# Altium PCB EMBV3.PcbDoc
Units mm, origin at the board's own origin, x right, y up, seen from the top; angles counter-clockwise.
Board outline 31 x 65 mm, 2 copper layers (Top Layer, Bottom Layer); 66 components, 50 nets, 186 pads, 87 vias.
Unrouted connection lines stored in the file: 8.
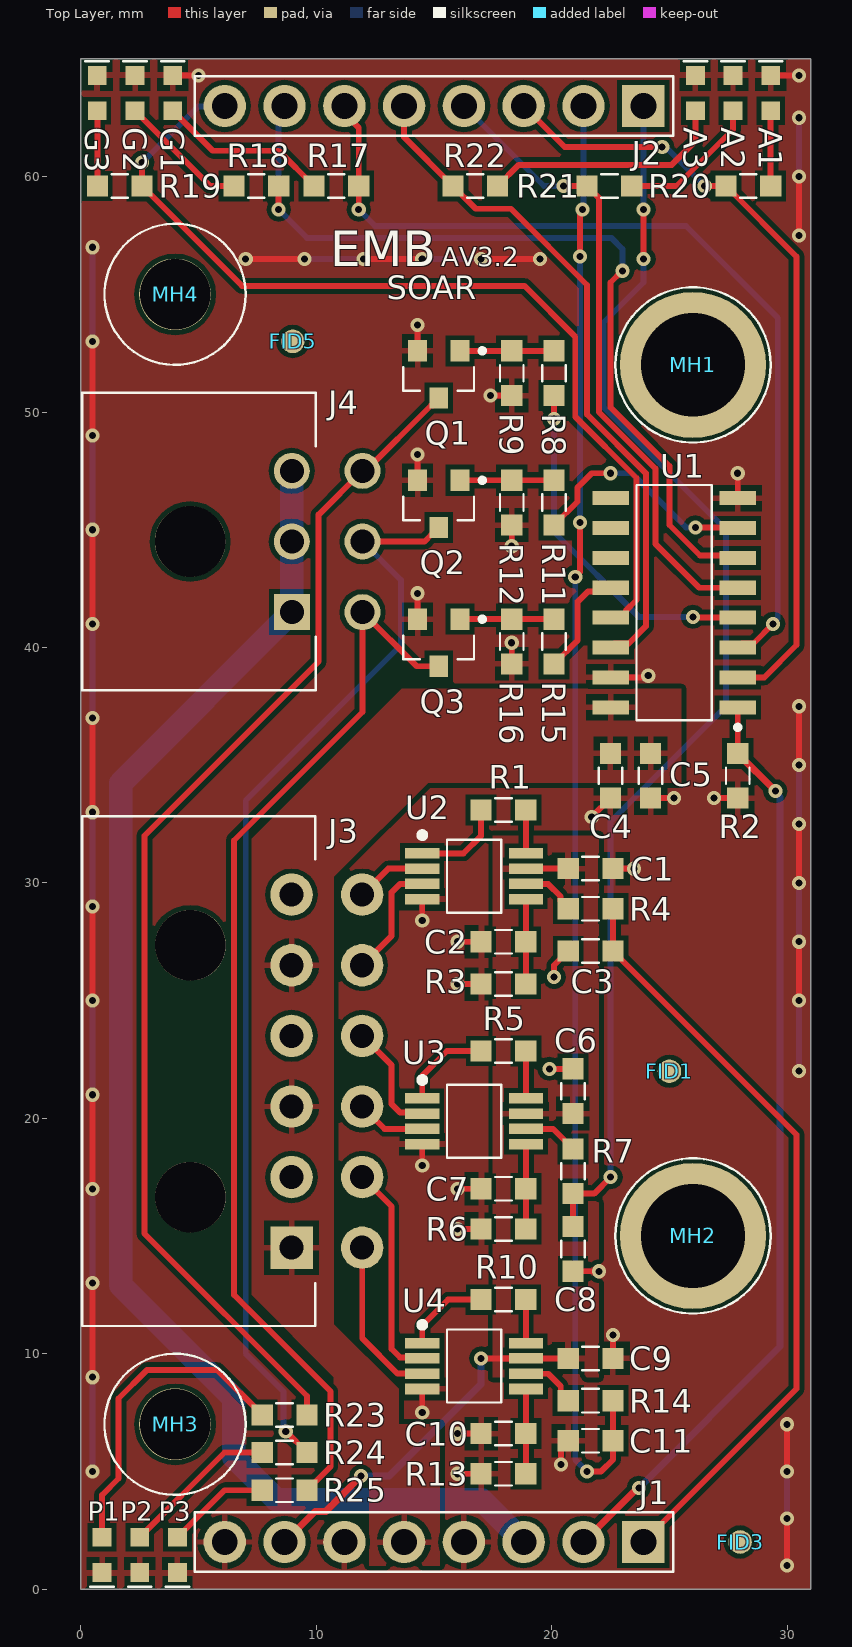
[diagram p0: Top Layer view]
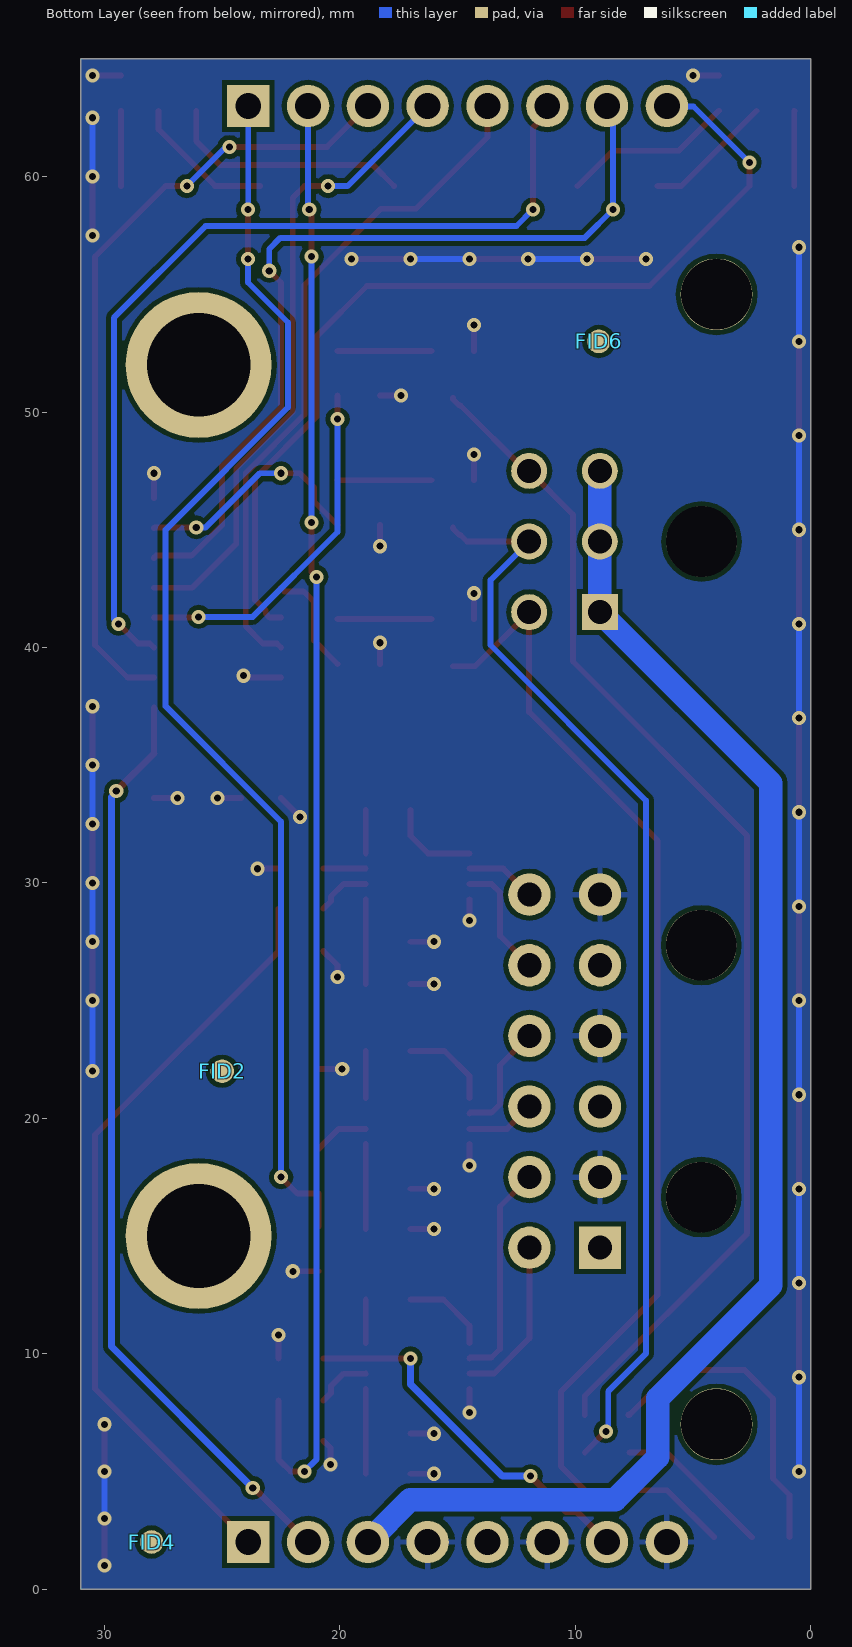
[diagram p1: Bottom Layer view, seen from below]
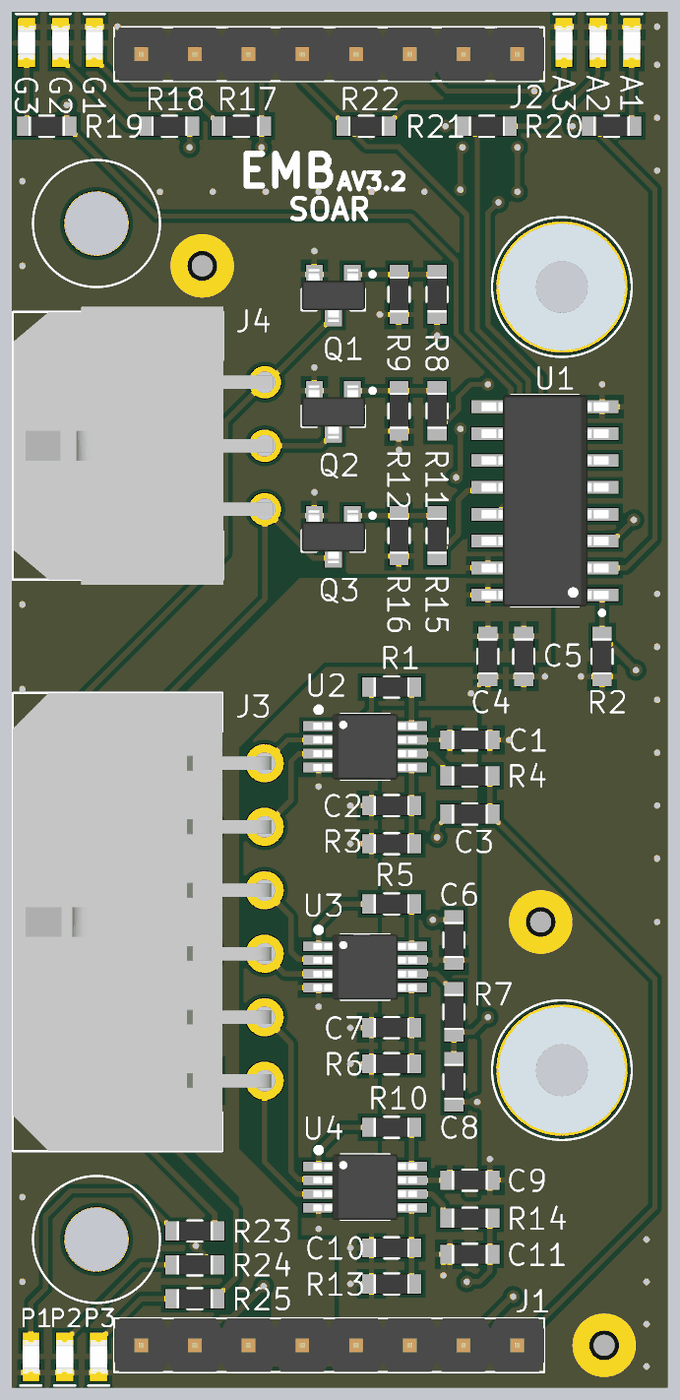
[diagram p2: 3D render of the assembled board from above, using the file's embedded part models]

## Layer stack, top to bottom
Top Solder: solder mask 0.0102, Solder Resist, Dk 3.5
Top Layer: signal copper 0.0711
Dielectric 1: dielectric 0.32, FR-4, Dk 4.8
Bottom Layer: signal copper 0.0711
Bottom Solder: solder mask 0.0102, Solder Resist, Dk 3.5

## Board outline
0,0 31,0 31,65 0,65

## Design rules (kind name [scope] priority, off if disabled: settings)
Clearance [All] p1: gap=0.2 ignorepadtopadclearanceinfootprint=FALSE except(0: Arc-Hole Track-Hole SMDPad-Hole THPad-Hole Via-Hole Fill-Hole Poly-Hole Region-Hole Text-Hole; 0.15: Arc-Arc Arc-Track Track-Track)
DiffPairsRouting [All] p1: maxlimit=0.25 minlimit=0.15 mostfreqgap=0.15 toplayer_minwidth=0.15 toplayer_maxwidth=0.25 toplayer_prefwidth=0.25 bottomlayer_minwidth=0.15 bottomlayer_maxwidth=0.25 bottomlayer_prefwidth=0.25 maxuncoupledlength=12.7
Height [All] p1: minheight=0 maxheight=30 prefheight=12.7
HoleSize [All] p1: absolutevalues=TRUE maxlimit=5 minlimit=0.3 maxpercent=80.000 minpercent=20.000
MinimumSolderMaskSliver [All] p1: minsoldermaskwidth=0.076
PolygonConnect [All] p1: thpad.connectstyle=Relief thpad.reliefconductorwidth=0.254 thpad.reliefentries=4 thpad.polygonreliefangle="90 Angle" thpad.airgapwidth=0.254 smdpad.connectstyle=Relief smdpad.reliefconductorwidth=0.254 smdpad.reliefentries=4 smdpad.polygonreliefangle="90 Angle" smdpad.airgapwidth=0.254 via.connectstyle=Direct via.reliefconductorwidth=0.254 via.reliefentries=4 via.polygonreliefangle="90 Angle" via.airgapwidth=0.254
RoutingVias [All] p1: holewidth=0.35 width=0.7 viastyle="Through Hole" minholewidth=0.25 minwidth=0.5 maxholewidth=0.711 maxwidth=1.27
SilkToSilkClearance [All] p1: silktosilkclearance=0.1
SilkToSolderMaskClearance [IsPad] p1: minsilkscreentomaskgap=0.09 clearancetoexposedcopper=TRUE
SolderMaskExpansion SolderMaskExpansion_Vias [IsVia] p1: expansion=0 istentingtop=TRUE
SolderMaskExpansion [All] p2: expansion=0.05 istentingtop=FALSE
Width [All] p1: maxlimit=2 minlimit=0.2 preferedwidth=0.25 minimp=50.000000 maximp=50.000000 favimp=50.000000
24 further rules are at their usual default settings.

## Components (designator, comment, footprint, x,y, rotation, side; value= is the part's Value field where it differs from the comment)
A1 "LTST-C191KGKT" LTST-C191KGKT 29.304,63.55 r270 top
A2 "LTST-C191KGKT" LTST-C191KGKT 27.7,63.55 r270 top
A3 "LTST-C191KGKT" LTST-C191KGKT 26.1,63.55 r270 top
C1 "CGA3E2X7R1E104K080AA" 0603[1608] 21.65,30.604 r180 top
C2 "CC0603JRNPO9BN511" 0603[1608] 17.95,27.5 r0 top
C3 "CL10A105KP8NNNC" 0603[1608] 21.65,27.1 r0 top
C4 "CL10A106MP8NNNC" 0603[1608] 22.496,34.55 r90 top
C5 "CGA3E2X7R1E104K080AA" 0603[1608] 24.2,34.55 r90 top
C6 "CGA3E2X7R1E104K080AA" 0603[1608] 20.9,21.15 r270 top
C7 "CC0603JRNPO9BN511" 0603[1608] 17.95,17.004 r0 top
C8 "CL10A105KP8NNNC" 0603[1608] 20.9,14.45 r90 top
C9 "CGA3E2X7R1E104K080AA" 0603[1608] 21.65,9.8 r180 top
C10 "CC0603JRNPO9BN511" 0603[1608] 17.95,6.604 r0 top
C11 "CL10A105KP8NNNC" 0603[1608] 21.65,6.3 r0 top
FID1 "FID_1MM_ROUND_SL" FID_1MM_ROUND_SL 25,22 r0 top
FID2 "FID_1MM_ROUND_SL" FID_1MM_ROUND_SL 25,22 r90 bottom
FID3 "FID_1MM_ROUND_SL" FID_1MM_ROUND_SL 28,2 r90 top
FID4 "FID_1MM_ROUND_SL" FID_1MM_ROUND_SL 28,2 r90 bottom
FID5 "FID_1MM_ROUND_SL" FID_1MM_ROUND_SL 9,53 r90 top
FID6 "FID_1MM_ROUND_SL" FID_1MM_ROUND_SL 9,53 r90 bottom
G1 "LTST-C191KGKT" LTST-C191KGKT 3.9,63.55 r270 top
G2 "LTST-C191KGKT" LTST-C191KGKT 2.3,63.55 r270 top
G3 "LTST-C191KGKT" LTST-C191KGKT 0.692,63.55 r270 top
J1 "61300811121" 61300811121 15,2 r180 top locked
J2 "61300811121" 61300811121 15,63 r180 top locked
J3 "10132449-1221GLF" 10132449-1221GLF 8.3,22 r270 top
J4 "0430450600" 0430450600 6.8,44.5 r270 top
MH1 "9774110360R" Standoff 26,52 r0 top locked
MH2 "9774110360R" Standoff 26,15 r0 top locked
MH3 "Mounting Hole" MOUNT-HOLE 4,7 r0 top locked
MH4 "Mounting Hole" MOUNT-HOLE 4,55 r0 top locked
P1 "LTST-C191KGKT" LTST-C191KGKT 0.9,1.45 r90 top
P2 "LTST-C191KGKT" LTST-C191KGKT 2.5,1.45 r90 top
P3 "LTST-C191KGKT" LTST-C191KGKT 4.1,1.45 r90 top
Q1 "DMN3023L-7" DMN3023L-7 15.2,51.6 r270 top
Q2 "DMN3023L-7" DMN3023L-7 15.2,46.1 r270 top
Q3 "DMN3023L-7" DMN3023L-7 15.2,40.2 r270 top
R1 "MCT06030C1302FP500" 0603[1608] 17.95,33.1 r180 top
R2 "ERJ-3GEYJ103V" 0603[1608] 27.9,34.55 r90 top
R3 "ERJ-3EKF2003V" 0603[1608] 17.95,25.7 r0 top
R4 "ESR03EZPJ101" 0603[1608] 21.65,28.9 r0 top
R5 "MCT06030C1302FP500" 0603[1608] 17.95,22.854 r180 top
R6 "ERJ-3EKF2003V" 0603[1608] 17.95,15.3 r0 top
R7 "ESR03EZPJ101" 0603[1608] 20.9,17.75 r270 top
R8 "RC1608F331CS" 0603[1608] 20.1,51.65 r90 top
R9 "ERJ-3GEYJ103V" 0603[1608] 18.3,51.65 r90 top
R10 "MCT06030C1302FP500" 0603[1608] 17.95,12.3 r180 top
R11 "RC1608F331CS" 0603[1608] 20.1,46.15 r90 top
R12 "ERJ-3GEYJ103V" 0603[1608] 18.3,46.15 r90 top
R13 "ERJ-3EKF2003V" 0603[1608] 17.95,4.9 r0 top
R14 "ESR03EZPJ101" 0603[1608] 21.65,8.004 r0 top
R15 "RC1608F331CS" 0603[1608] 20.1,40.25 r90 top
R16 "ERJ-3GEYJ103V" 0603[1608] 18.3,40.25 r90 top
R17 "RC1608F331CS" 0603[1608] 10.85,59.6 r0 top
R18 "RC1608F331CS" 0603[1608] 7.45,59.6 r0 top
R19 "RC1608F331CS" 0603[1608] 1.65,59.6 r0 top
R20 "RC1608F331CS" 0603[1608] 28.35,59.6 r180 top
R21 "RC1608F331CS" 0603[1608] 22.45,59.6 r180 top
R22 "RC1608F331CS" 0603[1608] 16.75,59.6 r180 top
R23 "ERA-3AEB2491V" 0603[1608] 8.65,7.4 r0 top
R24 "ERA-3AEB2491V" 0603[1608] 8.65,5.8 r0 top
R25 "ERA-3AEB2491V" 0603[1608] 8.65,4.2 r0 top
U1 "SN74HC157DR" SOIC127P600X175-16N 25.2,41.9 r180 top
U2 "INA326EA/2K5" TSOP65P490X110-8N 16.7,30.279 r0 top
U3 "INA326EA/2K5" TSOP65P490X110-8N 16.7,19.875 r0 top
U4 "INA326EA/2K5" TSOP65P490X110-8N 16.7,9.475 r0 top

## Footprints (in the part's own frame and the unit in brackets; to place one, negate y for a bottom-side part, rotate by r counter-clockwise, add the part's x,y. Pads: shape width x height; smd on the part's side, far side on the other; paste and mask are expansions set on the pad)
0603[1608] [mm]
  rect 0.9x0.9 smd mask+0.05: 1(-0.95,0) 2(0.95,0)
  silkscreen extent -0.35,-0.5 0.35,0.5, body extent -0.85,-0.45 0.85,0.45, height 0.55
10132449-1221GLF [mm] "CONN HEADER R/A 12POS 3MM"
  rect 1.8x1.8 hole 1.02 mask+0.05: 1(7.5,0.65)
  round 1.8 hole 1.02 mask+0.05: 2(7.5,3.65) 3(4.5,0.65) 4(4.5,3.65) 5(1.5,0.65) 6(1.5,3.65) 7(-1.5,0.65) 8(-1.5,3.65) 9(-4.5,0.65) 10(-4.5,3.65) 11(-7.5,0.65) 12(-7.5,3.65)
  round 3 hole 3 mask+0.05: ""(-5.35,-3.65) ""(5.35,-3.65)
  silkscreen extent -10.82,-8.25 10.82,1.65, body extent -10.82,-8.25 10.83,3.97, height 8.78
0430450600 [mm] "6-Pin Molex 3.00mm Pitch"
  round 3 hole 3 unplated mask+0.05: 0(0,-2.16)
  rect 1.53x1.53 hole 1.02 mask+0.05: 1(3,2.16)
  round 1.53 hole 1.02 mask+0.05: 2(0,2.16) 3(-3,2.16) 4(3,5.16) 5(0,5.16) 6(-3,5.16)
  silkscreen extent -6.32,-6.75 6.33,3.18, body extent -6.57,-6.7 6.58,5.54, height 8.28
61300811121 [mm] "CONN HEADER VERT 8POS 2.54MM"
  rect 1.8x1.8 hole 1.1 mask+0.05: 1(-8.89,0)
  round 1.8 hole 1.1 mask+0.05: 2(-6.35,0) 3(-3.81,0) 4(-1.27,0) 5(1.27,0) 6(3.81,0) 7(6.35,0) 8(8.89,0)
  silkscreen extent -10.16,-1.27 10.16,1.27, body extent -10.16,-1.27 10.16,1.27, height 8.57
DMN3023L-7 [mm] "MOSFET N-CH 30V 6.2A SOT23"
  rect 0.9x0.8 smd: 1(-1,0.9) 2(-1,-0.9) 3(1,0)
  silkscreen extent -1.1,-1.5 0.7,1.95, body extent -1.25,-1.5 1.25,1.5, height 1.1
FID_1MM_ROUND_SL [mm] "Fiducial 1MM Round Single Layer"
  round 1 smd mask+1: 0(0,0)
LTST-C191KGKT [mm] "Green 571nm LED Indication - Discrete 2V 0603"
  rect 0.8x0.8 smd paste-3 mask+0.05: 1(-0.75,0) 2(0.75,0)
  silkscreen extent -1.35,-0.5 -1.35,0.5, body extent -0.8,-0.4 0.8,0.4, height 0.8
MOUNT-HOLE [mil] "#4, 0.116in"
  round 120 hole 118 unplated mask+1.97: 0(0,0)
  silkscreen extent -118,-118 118,118, body extent 0,128 0,128, height 10
SOIC127P600X175-16N [mm] "SOIC, 16-Leads, Body 9.90x3.90mm, Pitch 1.27mm, IPC Medium Density"
  rect 1.55x0.6 smd: 1(-2.7,4.445) 2(-2.7,3.175) 3(-2.7,1.905) 4(-2.7,0.635) 5(-2.7,-0.635) 6(-2.7,-1.905) 7(-2.7,-3.175) 8(-2.7,-4.445) 9(2.7,-4.445) 10(2.7,-3.175) 11(2.7,-1.905) 12(2.7,-0.635) 13(2.7,0.635) 14(2.7,1.905) 15(2.7,3.175) 16(2.7,4.445)
  silkscreen extent -2.8,-5 1.6,5.39, body extent -3,-5 3,5, height 1.75
Standoff [mm] "#4, 0.116in"
  round 6.2 hole 4.4 unplated mask+0.05: 0(0,0)
  silkscreen extent -3.3,-3.3 3.3,3.3, body extent -3,-3 3,3, height 11
TSOP65P490X110-8N [mm] "TSOP, 8-Leads, Body 3.00x3.00mm, Pitch 0.65mm, IPC Medium Density"
  rect 1.45x0.45 smd mask+0.05: 1(-2.2,0.975) 2(-2.2,0.325) 3(-2.2,-0.325) 4(-2.2,-0.975) 5(2.2,-0.975) 6(2.2,-0.325) 7(2.2,0.325) 8(2.2,0.975)
  silkscreen extent -2.32,-1.55 1.15,1.87, body extent -2.45,-1.55 2.45,1.55, height 1.1

## Part data
A1 A2 A3 G1 G2 G3 P1 P2 P3: "LED GREEN CLEAR SMD 0603", Colour=Green, Current - Test=20mA, Lens Color=Colourless, Manufacturer="Lite-On Inc.", Millicandela Rating=35mcd, Package / Case="0603 (1608 Metric)", Supplier Part Number 1=160-1446-1-ND, Voltage - Forward (Vf) (Typ)=2V, ComponentLink1Description=Datasheet, ComponentLink1URL=http://optoelectronics.liteon.com/upload/download/DS22-2000-228/LTST-C191KGKT.PDF, Height (Max)=0.65mm, Lens Size="1.10mm x 0.80mm", Lens Style="Rectangle with Flat Top", Lens Transparency=Clear, Manufacturer Part Number=LTST-C191KGKT, Mounting Type="Surface Mount", Size / Dimension="1.60mm L x 0.80mm W", Supplier 1=Digi-Key, Viewing Angle=130°, Wavelength - Dominant=571nm, Wavelength - Peak=574nm
C1 C5 C6 C9: "CAP CER 0.1UF 25V X7R 0603", Capacitance=0.1µF, Manufacturer="TDK Corporation", Operating Temperature="-55°C ~ 125°C", Package / Case="0603 (1608 Metric)", Supplier Part Number 1=445-5667-1-ND, Temperature Coefficient=X7R, Tolerance=±10%, Voltage - Rated=25V, ComponentLink1Description=Datasheet, ComponentLink1URL=https://product.tdk.com/info/en/catalog/spec/mlccspec_automotive_general_en.pdf, Manufacturer Part Number=CGA3E2X7R1E104K080AA, Mounting Type="Surface Mount, MLCC", Size / Dimension="0.063\" L x 0.031\" W (1.60mm x 0.80mm)", Supplier 1=Digi-Key, Thickness (Max)="0.035\" (0.90mm)"
C2 C7 C10: "CAP CER 4.7UF 25V X5R 0603", Capacitance=510pF, Manufacturer=Yageo, Operating Temperature="-55°C ~ 125°C", Package / Case="0603 (1608 Metric)", Supplier Part Number 1=311-3972-1-ND, Temperature Coefficient="C0G, NP0", Tolerance=±5%, Voltage - Rated=50V, ComponentLink1Description=Datasheet, ComponentLink1URL=https://www.yageo.com/upload/media/product/productsearch/datasheet/mlcc/UPY-GP_NP0_16V-to-50V_18.pdf, Manufacturer Part Number=CC0603JRNPO9BN511, Mounting Type="Surface Mount, MLCC", Size / Dimension="0.063\" L x 0.031\" W (1.60mm x 0.80mm)", Supplier 1=Digi-Key, Thickness (Max)="0.035\" (0.90mm)"
C3 C8 C11: "CAP CER 1UF 10V X5R 0603", Capacitance=1uF, Manufacturer="Samsung Electro-Mechanics", Operating Temperature="-55°C ~ 85°C", Package / Case="0603 (1608 Metric)", Supplier Part Number 1=1276-1182-1-ND, Temperature Coefficient=X5R, Tolerance=±10%, Voltage - Rated=10V, ComponentLink1Description=Datasheet, ComponentLink1URL=http://www.samsungsem.com/kr/support/product-search/mlcc/__icsFiles/afieldfile/2019/05/10/19-CL10A105KP8NNNC.pdf, Manufacturer Part Number=CL10A105KP8NNNC, Mounting Type="Surface Mount, MLCC", Size / Dimension="0.063\" L x 0.031\" W (1.60mm x 0.80mm)", Supplier 1=Digi-Key, Thickness (Max)="0.035\" (0.90mm)"
C4: "CAP CER 10UF 10V X5R 0603", Capacitance=10µF, Manufacturer="Samsung Electro-Mechanics", Operating Temperature="-55°C ~ 85°C", Package / Case="0603 (1608 Metric)", Supplier Part Number 1=1276-1871-1-ND, Temperature Coefficient=X5R, Tolerance=±20%, Voltage - Rated=10V, ComponentLink1Description=Datasheet, ComponentLink1URL=https://static6.arrow.com/aropdfconversion/f91a1722e2705c3d73cfb1979021b64ae4055093/19-cl10a106mp8nnnc.pdf, Manufacturer Part Number=CL10A106MP8NNNC, Mounting Type="Surface Mount, MLCC", Size / Dimension="0.063\" L x 0.031\" W (1.60mm x 0.80mm)", Supplier 1=Digi-Key, Thickness (Max)="0.035\" (0.90mm)"
FID1 FID2 FID3 FID4 FID5 FID6: "Fiducial 1mm Round Single Layer"
J1 J2: "CONN HEADER VERT 8POS  MALE 2.54MM", Current Rating (Amps)=3A, Insulation Color=Black, Manufacturer="Würth Elektronik", Material Flammability Rating="UL94 V-0", Operating Temperature="-40°C ~ 105°C", Supplier Part Number 1=732-5321-ND, Voltage Rating=250V, ComponentLink1Description=Drawing, ComponentLink1URL=https://www.we-online.de/katalog/datasheet/6130xx11121.pdf, Connector Type=Header, Contact Finish - Mating=Gold, Contact Length - Mating="0.236\" (6.00mm)", Contact Length - Post="0.118\" (3.00mm)", Contact Material="Copper Alloy", Contact Shape=Square, Contact Type="Male Pin", Fastening Type=Push-Pull, Insulation Height="0.100\" (2.54mm)", Insulation Material="Polybutylene Terephthalate (PBT)", Manufacturer Part Number=61300811121, Mounting Type="Through Hole", Number of Positions=8, Number of Rows=1, Overall Contact Length="0.454\" (11.54mm)", Pitch - Mating="0.100\" (2.54mm)", Shrouding=Unshrouded, Style="Board to Board or Cable", Supplier 1=Digi-Key, Termination=Solder
J3: "CONN HEADER R/A 12POS 3MM", Insulation Color=Black, Manufacturer="Amphenol ICC (FCI)", Material Flammability Rating="UL94 V-0", Operating Temperature="-40°C ~ 105°C", Supplier Part Number 1=609-5289-ND, Voltage Rating=250V, ComponentLink1Description=Datasheet, ComponentLink1URL=https://cdn.amphenol-icc.com/media/wysiwyg/files/documentation/datasheet/boardwiretoboard/bwb_minitekpwr3.0_hcc.pdf?__cf_chl_jschl_tk__=5b50c337d7977d3136f5a7e9c1a5138446a86722-1578191481-0-AdRe7fXYrldvOZ_oqyXIDS1Fw-yIkYCF-QCdaR8gv5bvudzwMePuF1OnY_qX9R1SRbUtnU8KyfMeQWvo-tgbYDs0UY0fEf2VYly7RnE44wN6RCRwe79pwwTkwB-vrp_E3FFt_m8Gv1l0VQgfDvqJJh9NWsFdXN6uiHYgEWJHQlxni9pgO_Rgu9b74Q_adNTuUPkDts4F_sjwuXFS2gwZ4qhDRVIbOsJk9z2IFwtIQbJe2Vjr12REDPUJnSIFI5L_m3PVR56FMV99EE0fexLx9E4Xzm8z4yXY4QuL_nxicuZLnFM8rKw84cv6VQDtrcv1h8b5URSWpnxkbKmN-6xqBT_N2gwuiomQytubllip4AB4QtXNO4uZy8p0Kaq8ZXDsS9f0XOGpGrNCvURFRCr5YrB2nakG2mZwStZMD_Rr-W-x1kEQ5VT0_Uar3vHfURsPPw, ComponentLink2Description=Drawing, ComponentLink2URL=https://cdn.amphenol-icc.com/media/wysiwyg/files/drawing/10132449.pdf?__cf_chl_jschl_tk__=3fb7538f61705fd3db72d6547b71e22025aaeae6-1578191484-0-ARZmBU2d2iTfwOyvkDW6juGvz8Wa7jPk-lPTAGC3bi6AwA2PAOw_83XbqimUoaj63c73oghkBl5EBlxfVnJt5FnKIy9_Ampqry6wpxN3P9yFfGzzu2bzrkjXc8H98cNGfE4yNZOx4lVYAc0DYF8iUgUBt3ot3PAqRWTuL_OE0dIKXvMd7u_4fU7igR1oB3QBFAu564mexcV1Dg4phJ9BA4kHFs6CIC10MmA2ZlPsaDWmfr6ivcYRarJOnVBN46Piz5s9Rafd2OkXuSIM4yJjlli4dKOItRDrJD3hRC0iA9RVgXipc9Ibd3Qny2RaW6xQiV-dovtBkpyFUGJQUyK5Difre6fQiv59Vrr2PfvD74WBgrERIBaIQ4JCRXFCC0XHSA, Contact Finish - Mating=Tin, Contact Finish - Post=Tin, Contact Length - Post="0.126\" (3.20mm)", Contact Material="Copper Alloy", Contact Shape=Square, Contact Type="Male Pin", Fastening Type="Locking Ramp", Features="Board Lock, Glow Wire Compliant", Insulation Height="0.343\" (8.71mm)", Insulation Material="Polyamide (PA9T), Nylon 9T", Manufacturer Part Number=10132449-1221GLF, Mounting Type="Through Hole, Right Angle", Number of Positions=12, Number of Positions Loaded=All, Number of Rows=2, Pitch - Mating="0.118\" (3.00mm)", Row Spacing - Mating="0.118\" (3.00mm)", Shrouding="Shrouded - 4 Wall", Style="Board to Cable/Wire", Supplier 1=Digi-Key, Termination=Solder
J4: "CONN HEADER R/A 6POS 3MM", Current Rating (Amps)=8A, Insulation Color=Black, Manufacturer=Molex, Material Flammability Rating="UL94 V-0", Supplier Part Number 1=WM1815-ND, Voltage Rating=600V, ComponentLink1Description=Drawing, ComponentLink1URL=https://www.molex.com/pdm_docs/sd/430450600_sd.pdf, ComponentLink2Description="Product Specification", ComponentLink2URL=https://www.molex.com/pdm_docs/ps/PS-43045.pdf, Contact Finish - Mating=Tin, Contact Finish - Post=Tin, Contact Finish Thickness - Mating="100.0µin (2.54µm)", Contact Length - Post="0.125\" (3.18mm)", Contact Material=Brass, Contact Shape=Square, Contact Type="Male Pin", Fastening Type="Locking Ramp", Features="Board Lock", Insulation Height="0.290\" (7.37mm)", Insulation Material="Liquid Crystal Polymer (LCP), Glass Filled", Manufacturer Part Number=0430450600, Mounting Type="Through Hole, Right Angle", Number of Positions=6, Number of Rows=2, Row Spacing - Mating="0.118\" (3.00mm)", Shrouding="Shrouded - 4 Wall", Supplier 1=Digi-Key, Termination=Solder
MH1 MH2: "ROUND STANDOFF M3X0.5 STEEL 11MM", Manufacturer="Würth Elektronik", Supplier Part Number 1=732-5278-1-ND, Between Board Height="0.433\" (11.00mm)", ComponentLink1Description=Datasheet, ComponentLink1URL=https://www.keyelco.com/userAssets/file/M65p77.pdf, Diameter - Outside="0.236\" (5.99mm)", Features="Surface Mount", Gender=Female, Length - Overall="0.488\" (12.40mm)", Manufacturer Part Number=9774110360R, Material=Steel, Screw, Thread Size=M3x0.5, Supplier 1=Digi-Key, Threaded/Unthreaded=Threaded, Type="Round Standoff"
MH3 MH4: "#4 Screw, 0.116in Diameter"
Q1 Q2 Q3: "MOSFET N-CH 30V 6.2A SOT23", Current - Continuous Drain (Id) @ 25C="6.2A (Ta)", Drain to Source Voltage (Vdss)=30V, Drive Voltage (Max Rds On, Min Rds On)="2.5V, 10V", Input Capacitance (Ciss) (Max) @ Vds="873pF @ 15V", Manufacturer="Diodes Incorporated", Operating Temperature="-55°C ~ 150°C (TJ)", Power Dissipation (Max)="900mW (Ta)", Supplier Device Package=SOT-23, Supplier Part Number 1=DMN3023L-7DICT-ND, ComponentLink1Description=Datasheet, ComponentLink1URL=https://www.diodes.com/assets/Datasheets/DMN3023L.pdf, FET Type=N-Channel, Gate Charge (Qg) (Max) @ Vgs="18.4nC @10V", Mounting Type="Surface Mount", Rds On (Max) @ Id, Vgs="25mOhm @ 4A, 10V", Supplier 1=Digi-Key, Technology="MOSFET (Metal Oxide)", Vgs (Max)=+-20V, Vgs(th) (Max) @ Id="1.8V @ 250µA"
R1 R5 R10: "RES SMD 13K OHM 1% 1/8W 0603", Manufacturer="Vishay Beyschlag", Operating Temperature="-55°C ~ 155°C", Package / Case="0603 (1608 Metric)", Power (Watts)="0.125W, 1/8W", Resistance=13K, Supplier Device Package=0603, Supplier Part Number 1=749-1606-1-ND, Temperature Coefficient=±50ppm/°C, Tolerance=±1%, ComponentLink1Description=Datasheet, ComponentLink1URL=http://www.vishay.com/docs/28705/mcx0x0xpro.pdf, Composition="Thin Film", Features=Anti-Sulfur, Height - Seated (Max)="0.022\" (0.55mm)", Manufacturer Part Number=MCT06030C1302FP500, Number of Terminations=2, Size / Dimension="0.061\" L x 0.033\" W (1.55mm x 0.85mm)", Supplier 1=Digi-Key
R2 R9 R12 R16: "RES SMD 10K OHM 5% 1/10W 0603", Manufacturer="Panasonic Electronic Components", Operating Temperature="-55°C ~ 155°C", Package="0603 (1608 Metric)", Power  (W)=0.1W, Resistance=10K, Supplier Part Number 1=P10KGCT-ND, Temperature Coefficient=±200ppm/°C, Tolerance=±5%, ComponentLink1Description=Datasheet, Composition="Thick Film", Manufacturer Part Number=ERJ-3GEYJ103V, Supplier 1=Digi-Key
  R2: ComponentLink1URL=http://www.yageo.com/documents/recent/PYu-RC_Group_51_RoHS_L_9.pdf
  R9 R12 R16: ComponentLink1URL=https://industrial.panasonic.com/cdbs/www-data/pdf/RDA0000/DMA0000COL11.pdf, ComponentLink2Description="Land Pattern", ComponentLink2URL=https://industrial.panasonic.com/cdbs/www-data/pdf/RDA0000/DMA0000COL17.pdf
R3 R6 R13: "RES SMD 200K OHM 1% 1/10W 0603", Manufacturer="Panasonic Electronic Components", Operating Temperature="-55°C ~ 155°C", Package="0603 (1608 Metric)", Power  (W)=0.1W, Resistance=200K, Supplier Part Number 1=P200KHCT-ND, Temperature Coefficient=±100ppm/°C, Tolerance=±1%, ComponentLink1Description=Datasheet, ComponentLink1URL=https://industrial.panasonic.com/cdbs/www-data/pdf/RDA0000/AOA0000C304.pdf, Composition="Thick Film", Manufacturer Part Number=ERJ-3EKF2003V, Supplier 1=Digi-Key
R4 R7 R14: "RES SMD 100 OHM 5% 1/4W 0603", Manufacturer="Rohm Semiconductor", Operating Temperature="-55°C ~ 155°C", Package="0603 (1608 Metric)", Power  (W)=0.25W, Resistance=100, Supplier Part Number 1=RHM100DCT-ND, Temperature Coefficient=±200ppm/°C, Tolerance=±5%, ComponentLink1Description=Datasheet, ComponentLink1URL=https://d1d2qsbl8m0m72.cloudfront.net/en/products/databook/datasheet/passive/resistor/chip_resistor/esr-e.pdf, Composition="Thick Film", Manufacturer Part Number=ESR03EZPJ101, Supplier 1=Digi-Key
R8 R11 R15 R17 R18 R19 R20 R21 R22: "RES SMD 330 OHM 1% 1/10W 0603", Manufacturer="Samsung Electro-Mechanics", Operating Temperature="-55°C ~ 155°C", Package="0603 (1608 Metric)", Power  (W)=0.1W, Resistance=330, Supplier Part Number 1=1276-4604-2-ND, Temperature Coefficient=±100ppm/°C, Tolerance=±1%, ComponentLink1Description=Datasheet, ComponentLink1URL=http://www.samsungsem.com/kr/support/product-search/chip-resistor/__icsFiles/afieldfile/2019/01/21/RC_Spec_Sheet(1901).pdf, Composition="Thick Film", Manufacturer Part Number=RC1608F331CS, Supplier 1=Digi-Key
R23 R24 R25: "RES SMD 2.49KOHM 0.1% 1/10W 0603", Manufacturer="Panasonic Electronic Components", Operating Temperature="-55°C ~ 155°C", Package="0603 (1608 Metric)", Power  (W)=0.1W, Resistance=2.49K, Supplier Part Number 1=P2.49KDBCT-ND, Temperature Coefficient=±25ppm/°C, Tolerance=±0.1%, ComponentLink1Description=Datasheet, ComponentLink1URL=https://industrial.panasonic.com/cdbs/www-data/pdf/RDM0000/AOA0000C307.pdf, Composition="Thin Film", Manufacturer Part Number=ERA-3AEB2491V, Supplier 1=Digi-Key
U1: "IC QUAD 2-1LN DATASEL/MUX 16SOIC", Base Part Number=74HC157, Current - Output High, Low="7.8mA, 7.8mA", Manufacturer="Texas Instruments", Operating Temperature="-40°C ~ 85°C", Package / Case="16-SOIC (0.154\", 3.90mm Width)", Supplier Device Package=16-SOIC, Supplier Part Number 1=296-14836-2-ND, Voltage - Supply="2V ~ 6V", Voltage Supply Source="Single Supply", Circuit="4 x 2:1", ComponentLink1Description=Datasheet, ComponentLink1URL=http://www.ti.com/lit/ds/symlink/sn74hc157.pdf, Independent Circuits=1, Manufacturer Part Number=SN74HC157DR, Mounting Type="Surface Mount", Supplier 1=Digi-Key, Type=Multiplexer
U2 U3 U4: "IC INST AMP 1 CIRCUIT 8VSSOP", Base Part Number=INA326, Current - Input Bias=200pA, Current - Output / Channel=25mA, Current - Supply=2.4mA, Manufacturer="Texas Instruments", Operating Temperature="-40°C ~ 85°C", Package / Case="8-TSSOP, 8-MSOP (0.118\", 3.00mm Width)", Supplier Device Package=8-VSSOP, Supplier Part Number 1=INA326EA/2K5CT-ND, Voltage - Input Offset=20µV, Voltage - Supply, Single/Dual (±)="2.7V ~ 5.5V, ±1.35V ~ 2.75V", -3db Bandwidth=1kHz, Amplifier Type=Instrumentation, ComponentLink1Description=Datasheet, ComponentLink1URL=http://www.ti.com/lit/ds/symlink/ina326.pdf, Manufacturer Part Number=INA326EA/2K5, Mounting Type="Surface Mount", Number of Circuits=1, Output Type=Rail-to-Rail, Supplier 1=Digi-Key

## Via types
v1: diameter 0.6, hole 0.3, Top Layer to Bottom Layer, tented both sides, 87 vias

## Nets (pads, with @x,y where several pads share a name; then routed paths per layer and width w, separated by ;. In a path a pad name is that pad's centre, name@x,y a point inside that pad or via, vN(x,y) a via of type N, cw(c..) or ccw(c..) an arc to the next point about the centre after c; other vN are vias at no path point)
+3V3: C1.2 C6.2 C9.2 J1.7 U2.7 U3.7 U4.7 | length 17.7
  Top Layer w0.25: v1(17,9.8) U4.7 C9.2 ; U2.7 C1.2
  Top Layer w0.3: J1.7 9.95,3.3 10.4,3.3 v1(11.9,4.8)
  Bottom Layer w0.3: v1(11.9,4.8) 13.1,4.8 17,8.7 v1(17,9.8)
+5V: C4.2 C5.2 J1.5 J3.1 J3.5 J3.9 U1.16
+12: J1.3 J4.1 J4.2 J4.3 | length 60.7
  Bottom Layer w1: J4.3 J4.2 J4.1 1.7,34.24 1.7,12.9 6.5,8.1 6.5,5.6 8.3,3.8 17.01,3.8 J1.3
AV_PROP1: J2.3 R20.2 U1.2 | length 33.8
  Top Layer w0.25: J2.3 20.552,61.258 v1(24.692,61.258) ; v1(26.5,59.6) R20.2 30.4,56.6 30.4,40.1 29.025,38.725 U1.2
  Bottom Layer w0.25: v1(24.692,61.258) 24.842,61.258 v1(26.5,59.6)
AV_PROP2: J2.4 R21.2 U1.5 | length 27.3
  Top Layer w0.25: v1(20.5,59.6) R21.2 22,59.1 22,50 24.4,47.6 24.4,44.4 26.265,42.535 U1.5
  Bottom Layer w0.25: J2.4 19.67,59.6 v1(20.5,59.6)
AV_PROP3: J2.5 R22.2 U1.14 | length 29.1
  Top Layer w0.25: J2.5 13.73,61.67 R22.2 16.766,58.634 18.266,58.634 21.5,55.4 21.5,49.9 24,47.4 24,40.9 23.27,40.17 22.675,40.17 U1.14
GND: A1.1 A2.1 A3.1 C1.1 C2.1 C3.1 C4.1 C5.1 C6.1 C7.1 C8.1 C9.1 C10.1 C11.1 G1.1 G2.1 G3.1 J1.4 J1.6 J1.8 J3.3 J3.7 J3.11 P1.1 P2.1 P3.1 Q1.2 Q2.2 Q3.2 R2.1 R3.1 R6.1 R9.1 R12.1 R13.1 R16.1 U1.8 U1.15 U2.4 U3.4 U4.4 | length 120.4
  Top Layer w0.25: v1(0.5,9) v1(0.5,13) ; v1(0.5,17) v1(0.5,21) ; v1(0.5,25) v1(0.5,29) ; v1(0.5,33) v1(0.5,37) ; v1(0.5,41) v1(0.5,45) ; v1(0.5,49) v1(0.5,53) ; G1.1 v1(5,64.3) ; v1(7,56.5) v1(9.5,56.5) ; v1(12,56.5) v1(14.5,56.5) ; Q3.2 v1(14.3,42.3) ; Q2.2 v1(14.3,48.2) ; Q1.2 v1(14.3,53.7) ; v1(14.5,7.5) U4.4 ; v1(14.5,18) U3.4 ; v1(14.5,28.4) U2.4 ; v1(16,4.9) R13.1 ; v1(16,6.6) 16.004,6.604 C10.1 ; v1(16,15.3) R6.1 ; v1(16,17) 16.004,17.004 C7.1 ; v1(16,25.7) R3.1 ; v1(16,27.5) C2.1 ; v1(17,56.5) v1(19.5,56.5) ; v1(17.4,50.7) R9.1 ; R16.1 v1(18.3,40.2) ; v1(18.3,44.3) R12.1 ; v1(19.9,22.1) C6.1 ; v1(20.1,26) 20.1,26.5 C3.1 ; v1(20.4,5.3) 20.4,6 C11.1 ; C8.1 v1(22,13.5) ; v1(21.7,32.8) 21.7,32.804 C4.1 ; U1.15 24.025,38.725 v1(24.1,38.8) ; C9.1 v1(22.6,10.8) ; C1.1 23.496,30.604 v1(23.5,30.6) ; C5.1 v1(25.2,33.6) ; v1(26.9,33.6) R2.1 ; U1.8 v1(27.9,47.4) ; A1.1 v1(30.5,64.3) ; v1(30,1) v1(30,3) ; v1(30,5) v1(30,7) ; v1(30.5,25) v1(30.5,27.5) ; v1(30.5,30) v1(30.5,32.5) ; v1(30.5,35) v1(30.5,37.5) ; v1(30.5,57.5) v1(30.5,60)
  Bottom Layer w0.25: v1(0.5,5) v1(0.5,9) ; v1(0.5,13) v1(0.5,17) ; v1(0.5,21) v1(0.5,25) ; v1(0.5,29) v1(0.5,33) ; v1(0.5,37) v1(0.5,41) ; v1(0.5,45) v1(0.5,49) ; v1(0.5,53) v1(0.5,57) ; v1(9.5,56.5) v1(12,56.5) ; v1(14.5,56.5) v1(17,56.5) ; v1(30,3) v1(30,5) ; v1(30.5,22) v1(30.5,25) ; v1(30.5,27.5) v1(30.5,30) ; v1(30.5,32.5) v1(30.5,35) ; v1(30.5,60) v1(30.5,62.5)
GS_PROP1: J2.6 R17.2 U1.3 | length 39.4
  Top Layer w0.25: J2.6 11.19,62.689 11.8,62.079 R17.2 v1(11.8,58.6) ; U1.3 28.075,40.17 28.57,40.17 v1(29.4,41)
  Bottom Layer w0.25: v1(11.8,58.6) 12.5,57.9 25.7,57.9 29.6,54 29.6,41.2 v1(29.4,41)
GS_PROP2: J2.7 R18.2 U1.6 | length 37.2
  Top Layer w0.25: v1(8.4,58.6) R18.2 ; v1(23,56) 22.5,55.5 22.5,50.2 25,47.7 25,45.2 26.296,43.904 27.801,43.904 U1.6
  Bottom Layer w0.25: J2.7 8.4,62.75 v1(8.4,58.6) 9.6,57.4 22.529,57.4 23,56.929 v1(23,56)
GS_PROP3: J2.8 R19.2 U1.13 | length 40.3
  Top Layer w0.25: v1(2.6,60.6) R19.2 6.85,55.35 18.85,55.35 21,53.2 21,49.8 23.6,47.2 23.6,42.011 23.15,41.561 23.15,41.44 22.975,41.265 U1.13
  Bottom Layer w0.25: v1(2.6,60.6) 4.981,62.981 6.091,62.981 J2.8
NetA1_2: A1.2 R20.1 | length 3.2
  Top Layer w0.25: R20.1 29.3,62.796 A1.2
NetA2_2: A2.2 R21.1 | length 6.1
  Top Layer w0.25: R21.1 25.3,59.6 27.7,62 A2.2
NetA3_2: A3.2 R22.1 | length 10.5
  Top Layer w0.25: R22.1 18.6,60.5 25.1,60.5 26.1,61.5 A3.2
NetC2_2: C2.2 R3.2 U2.5 | length 3.6
  Top Layer w0.25: R3.2 C2.2 U2.5
NetC7_2: C7.2 R6.2 U3.5 | length 3.6
  Top Layer w0.25: R6.2 C7.2 U3.5
NetC10_2: C10.2 R13.2 U4.5 | length 3.6
  Top Layer w0.25: R13.2 C10.2 U4.5
NetG1_2: G1.2 R17.1 | length 7.3
  Top Layer w0.25: G1.2 5.6,61.1 8.4,61.1 R17.1
NetG2_2: G2.2 R18.1 | length 5.5
  Top Layer w0.25: G2.2 5.5,59.6 R18.1
NetG3_2: G3.2 R19.1 | length 3.2
  Top Layer w0.25: G3.2 0.7,62.792 R19.1
NetJ3_2: J3.2 U4.3 | length 7
  Top Layer w0.25: J3.2 11.95,10.65 13.45,9.15 U4.3
NetJ3_4: J3.4 U4.2 | length 9.3
  Top Layer w0.25: J3.4 13.2,16.25 13.2,10.2 13.56,9.84 14.46,9.84 U4.2
NetJ3_6: J3.6 U3.3 | length 2.9
  Top Layer w0.25: J3.6 12.9,19.55 U3.3
NetJ3_8: J3.8 U3.2 | length 4.9
  Top Layer w0.25: J3.8 13.2,22.25 13.2,20.6 13.56,20.24 14.46,20.24 U3.2
NetJ3_10: J3.10 U2.3 | length 5.1
  Top Layer w0.25: J3.10 13.2,27.75 13.2,29.6 13.546,29.946 14.492,29.946 U2.3
NetJ3_12: J3.12 U2.2 | length 3
  Top Layer w0.25: J3.12 13.054,30.604 U2.2
NetP1_2: P1.2 R23.1 | length 13.6
  Top Layer w0.25: P1.2 0.9,4 1.6,4.7 1.6,8.1 2.8,9.3 5.8,9.3 R23.1 ; R23.1@7.725,7.425 R23.1@7.75,7.4
NetP2_2: P2.2 R24.1 | length 6.7
  Top Layer w0.25: P2.2 6.1,5.8 R24.1
NetP3_2: P3.2 R25.1 | length 4.4
  Top Layer w0.25: P3.2 6.1,4.2 R25.1
NetQ1_1: Q1.1 R8.2 R9.2 | length 4
  Top Layer w0.25: Q1.1 R9.2 R8.2
NetQ2_1: Q2.1 R11.2 R12.2 | length 4
  Top Layer w0.25: Q2.1 R12.2 R11.2
NetQ3_1: Q3.1 R15.2 R16.2 | length 4
  Top Layer w0.25: Q3.1 R16.2 R15.2
NetR1_1: R1.1 U2.8 | length 1.8
  Top Layer w0.25: U2.8 R1.1
NetR1_2: R1.2 U2.1 | length 3.9
  Top Layer w0.25: U2.1 16.254,31.254 17,32 R1.2
NetR4_1: R4.1 U2.6 | length 2.4
  Top Layer w0.25: U2.6 18.908,29.946 19.854,29.946 20.375,29.425 20.375,29.225 R4.1
NetR5_1: R5.1 U3.8 | length 2
  Top Layer w0.25: U3.8 R5.1
NetR5_2: R5.2 U3.1 | length 3.9
  Top Layer w0.25: U3.1 14.5,21.8 15.554,22.854 R5.2
NetR7_1: R7.1 U3.6 | length 2.4
  Top Layer w0.25: U3.6 20.05,19.55 R7.1
NetR10_1: R10.1 U4.8 | length 1.8
  Top Layer w0.25: U4.8 R10.1
NetR10_2: R10.2 U4.1 | length 3.7
  Top Layer w0.25: U4.1 14.5,11.2 15.6,12.3 R10.2
NetR14_1: R14.1 U4.6 | length 2.4
  Top Layer w0.25: U4.6 18.904,9.146 19.854,9.146 20.383,8.617 20.383,8.322 R14.1
PROP1: R8.1 U1.4 | length 15.1
  Top Layer w0.25: v1(20.1,49.7) R8.1 ; v1(26,41.3) 26.035,41.265 U1.4
  Bottom Layer w0.25: v1(20.1,49.7) 20.1,44.9 23.7,41.3 v1(26,41.3)
PROP2: R11.1 U1.7 | length 10
  Top Layer w0.25: R11.1 21.1,46.2 21.1,46.8 21.7,47.4 v1(22.5,47.4) ; v1(26.1,45.1) 27.875,45.1 U1.7
  Bottom Layer w0.25: v1(22.5,47.4) 23.4,47.4 25.7,45.1 v1(26.1,45.1)
PROP3: R15.1 U1.12 | length 4.7
  Top Layer w0.25: R15.1 21.1,40.3 21.1,41.939 21.546,42.384 22.349,42.384 U1.12
PS1: C3.2 J1.1 R4.2 | length 32.8
  Top Layer w0.25: R4.2 C3.2 30.4,19.3 30.4,8.51 J1.1
PS2: C8.2 J2.1 R7.2 | length 53.7
  Top Layer w0.25: C8.2 R7.2 21.8,16.8 v1(22.5,17.5) ; v1(23.9,56.5) v1@23.9,58.5
  Bottom Layer w0.25: v1(22.5,17.5) 22.5,32.6 27.4,37.5 27.4,45 22.2,50.2 22.2,53.8 23.9,55.5 v1(23.9,56.5) ; J2.1 23.89,58.51 v1@23.9,58.5
  other v1: 23.9,58.6
PS3: C11.2 J2.2 R14.2 | length 62.2
  Top Layer w0.25: v1(21,43) 21.2,43.2 v1(21.2,45.3) ; v1(21.2,56.6) 21.2,58.405 21.3,58.505 v1(21.3,58.6) ; v1(21.5,5) 22.1,5 22.6,5.5 C11.2 R14.2
  Bottom Layer w0.25: v1(21,43) 21,5.5 v1(21.5,5) ; v1@21.2,45.268 v1(21.2,45.3) v1(21.2,56.6) ; v1(21.3,58.6) 21.35,58.65 J2.2
SOL1: J4.6 Q1.3 R23.2 | length 51.3
  Top Layer w0.25: R23.2 9.6,8.2 2.7,15.1 2.7,32 10.1,39.4 10.1,45.64 J4.6 12.1,47.5 14.875,50.275 14.925,50.275 15.2,50.55 Q1.3
SOL2: J4.5 Q2.3 R24.2 | length 46.7
  Top Layer w0.25: v1(8.7,6.7) R24.2 ; J4.5 14.6,44.5 14.875,44.775 14.925,44.775 15.2,45.05 Q2.3
  Bottom Layer w0.25: v1(8.7,6.7) 8.6,6.8 8.6,8.4 7,10 7,33.5 13.6,40.1 13.6,42.86 J4.5
SOL3: J4.4 Q3.3 R25.2 | length 45.9
  Top Layer w0.25: R25.2 10.6,5.2 10.6,8.4 6.5,12.5 6.5,31.8 11.96,37.26 J4.4 14.26,39.2 Q3.3
SOL_CTRL: J1.2 R2.2 U1.1 | length 39.7
  Top Layer w0.25: R2.2 U1.1
  Top Layer w0.3: J1.2 23.65,4.3 v1(23.7,4.3) ; R2.2 v1(29.5,33.9)
  Bottom Layer w0.3: v1(23.7,4.3) 29.7,10.3 29.7,33.646 29.5,33.846 v1(29.5,33.9)
pads on no net: FID1.0 FID2.0 FID3.0 FID4.0 FID5.0 FID6.0 J3. J4.0 MH1.0 MH2.0 MH3.0 MH4.0 U1.9 U1.10 U1.11

## Polygon pours and split planes (outlines as drawn)
GND on Bottom Layer "GND_L02_P000" (solid, remove dead copper, pour order 0): 0,0 0,65 31,65 31,0
GND on Top Layer "NONET_L-01_P-001" (solid, remove dead copper, pour order 6): 0,0 0,65 31,65 31,0
+5V on Top Layer "NONET_L-01_P-001" (solid, remove dead copper, pour order 5): 12.25,1 15.25,1 15.25,7 13.5,7 13.5,8.5 10.75,11.25 10.75,30.25 14.75,34.25 25.5,34.25 25.5,38.25 13.619,38.25 7.25,31.881 7.25,12.5 10.75,9 10.75,4.5 12.25,4.5
+3V3 on Top Layer "+3V3_L01_P003" (solid, remove dead copper, pour order 3): 17.5,9 22,9 22,32 17.5,32

## Silkscreen, mask and mechanical layers (free items; w line width, h text height)
Top Overlay:
  text "EMB" at 10.6,56.2 h1.5
  text "AV3.2" at 15.3,56.2 h0.8
  text "SOAR" at 13,54.8 h1
Board Outline:
  the board outline again, w0.1

## Dimensions
0,0 to 31,0 on Dimensions
0,0 to -1,65 on Dimensions